# EAGLE board PCB_v1.1 (EAGLE 9.7.0)
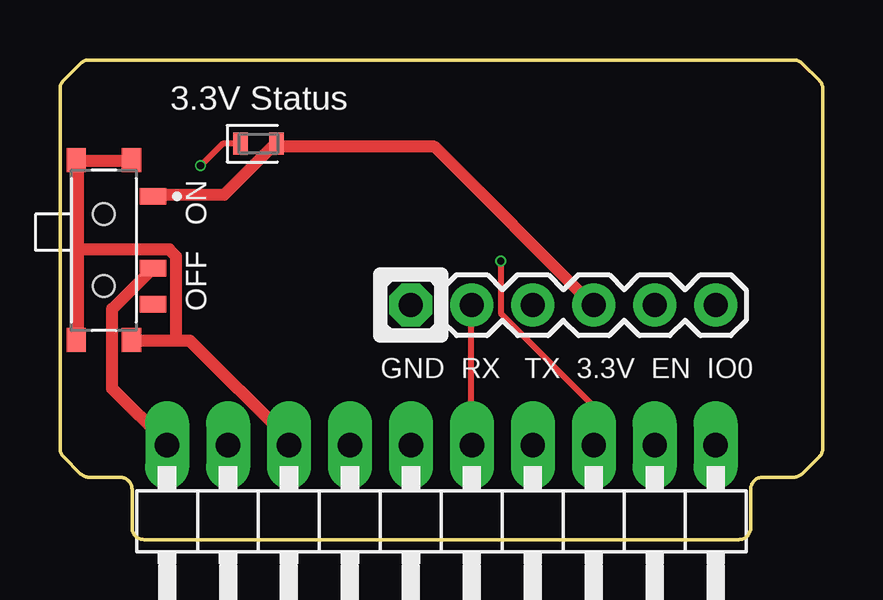
[diagram p0: board, top side]
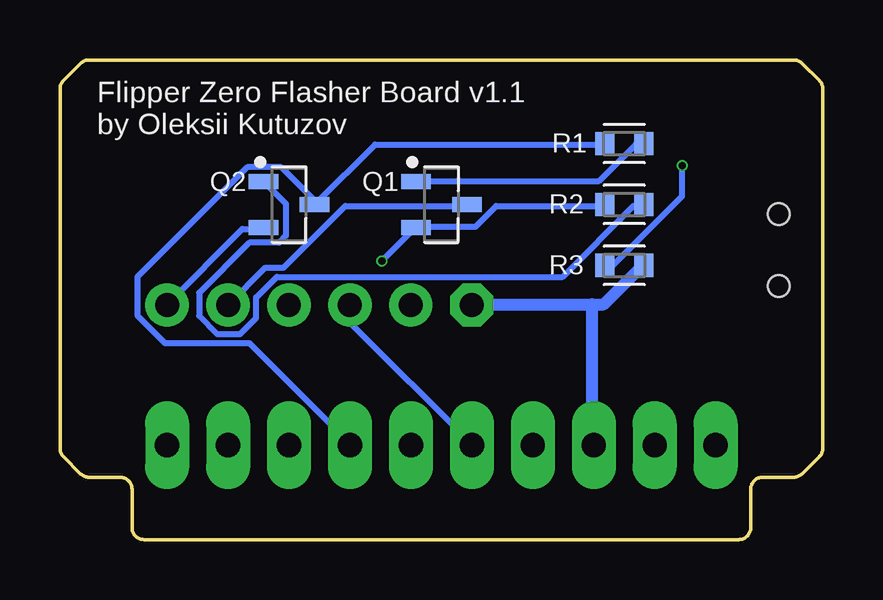
[diagram p1: board, bottom side, seen from below]

Size 31.78 x 20 mm. Coordinates in mm from the lower left corner, seen from the top.
Outline: 29.28,2.6 30.57,2.6 arc45 30.93,2.75 31.63,3.45 arc45 31.78,3.81 31.78,18.79 arc45 31.63,19.15 30.93,19.85 arc45 30.57,20 1.21,20 arc45 0.85,19.85 0.15,19.15 arc45 0,18.79 0,3.81 arc45 0.15,3.45 0.85,2.75 arc45 1.21,2.6 2.5,2.6 arc-90 3,2.1 3,0.5 arc90 3.5,0 28.28,0 arc90 28.78,0.5 28.78,2.1 arc-90 29.28,2.6
Copper layers (1*16): Top / Bottom
Stack-up Default Layer Stack: Top User Defined 0.035mm / Dielectric-1 User Defined 1.6mm / Bottom User Defined 0.035mm
Design rules "jlcpcb-2layers": minimum track width 5mil, minimum drill 0.3mm, track to track 5mil, track to pad 5mil, pad to pad 5mil, via to via 5mil, smd to smd 5mil, copper to edge 0.2mm, drill to drill 6mil, minimum pad ring 10mil, minimum via ring 3mil, stop-mask expansion 4mil, vias tented up to drill 0mil, thermal gap 10mil
Net classes: 0 default: width 0.254 mm; 1 Power: width 0.508 mm

## Footprints (pad centres in the part's own frame; a part is rotated, then mirrored left to right if it is on the bottom)
LEDC1608X55N_FLAT-B = smd 0.612 x 0.912: A 0.75,0; C -0.75,0
1X6-2.54-PLAIN = drill 1 octagon: 1 -6.35,0 | drill 1: 2 -3.81,0; 3 -1.27,0; 4 1.27,0; 5 3.81,0; 6 6.35,0
1X10/90 = drill 1.016 long: 1 -11.43,-3.81; 2 -8.89,-3.81; 3 -6.35,-3.81; 4 -3.81,-3.81; 5 -1.27,-3.81; 6 1.27,-3.81; 7 3.81,-3.81; 8 6.35,-3.81; 9 8.89,-3.81; 10 11.43,-3.81
SOT95P237X112-3N = smd 1.224 x 0.625: 1 -1.064,0.95; 2 -1.064,-0.95; 3 1.064,0
RESC1608X60 = smd 0.799 x 0.974: 1 -0.815,0; 2 0.815,0
SW_MLL1200S = smd 0.7 x 1.1: 1 -2.25,2.05; 2 0.75,2.05; 3 2.25,2.05 | smd 1 x 0.8: G1 -3.75,1.15; G2 3.75,1.15; G3 -3.75,-1.15; G4 3.75,-1.15 | hole 0.9: -1.5,0; 1.5,0

## Placement (x,y rotation side)
D1  LED_GREEN  [LEDC1608X55N_FLAT-B]  8.27,16.51 0 top
ESPF  ESPFLASH-1X6-2.54-PLAIN  [1X6-2.54-PLAIN]  20.97,9.78 0 top
JP1  PINHD-1X10/90  [1X10/90]  15.89,0.12 180 top
Q1  NPN  [SOT95P237X112-3N]  15.89,13.97 0 bottom
Q2  NPN  [SOT95P237X112-3N]  22.24,13.97 0 bottom
R1  12K  [RESC1608X60]  8.27,16.51 0 bottom
R2  12K  [RESC1608X60]  8.27,13.97 0 bottom
R3  4.7K  [RESC1608X60]  8.27,11.43 0 bottom
SW1  MLL1200S  [SW_MLL1200S]  1.83,12.06 270 top

## Library data of the parts
D1 = LED; CATEGORY: LED; COLOR: BLUE; DESCRIPTION: CHIP LED FLAT; SUB-CATEGORY: CHIP; TYPE: FLAT_TOP
ESPF = SuperHouse-ESPFlash
JP1 = Connector; CATEGORY: CONNECTOR; SUB-CATEGORY: PIN-HEADER
Q1 Q2 = Transistor; CATEGORY: Transistor; SUB-CATEGORY: BJT; TYPE: NPN
R1-R3 = Resistor; CATEGORY: Resistor; SUB-CATEGORY: Fixed
SW1 = MLL1200S; COMMENT: 1437575-1

## Nets
3.3V [Power]: JP1.10 SW1.2
CH_EN: ESPF.5 Q1.3
DTR: JP1.4 Q2.3 R1.1
ESP_3.3V [Power]: D1.A ESPF.4 SW1.1
FLIPPER_RX: ESPF.2 JP1.5
FLIPPER_TX: ESPF.3 JP1.6
GND [Power]: ESPF.1 JP1.8 R3.2 SW1.G1 SW1.G2 SW1.G3 SW1.G4
GPIO0: ESPF.6 Q2.2
N$1: D1.C R3.1
N$3: Q1.1 R1.2
N$5: Q2.1 R2.2
RTS: JP1.3 Q1.2 R2.1

## Tracks (layer width: path | path; a pad name or v marks a point on that pad's centre or on a via)
3.3V
  Top 0.508: SW1.2 3.79,11.24 2.17,9.62 2.17,6.29 4.46,4 JP1.10
CH_EN
  Bottom 0.254: ESPF.5 23.22,11.34 22.46,11.34 19.89,13.91 14.84,13.91 Q1.3
DTR
  Bottom 0.254: R1.1 9.13,16.48 18.65,16.48 21.13,14 Q2.3 21.13,14.1 22.56,15.53 23.99,15.53 28.56,10.95 28.56,9.34 27.41,8.19 23.89,8.19 19.7,4 JP1.4
ESP_3.3V
  Top 0.508: SW1.1 3.89,14.38 6.84,14.38 8.94,16.48 D1.A 9.22,16.38 15.6,16.38 22.18,9.81 ESPF.4
FLIPPER_RX
  Top 0.254: ESPF.2 17.13,9.72 17.13,4 JP1.5
FLIPPER_TX
  Bottom 0.254: ESPF.3 19.7,9.05 14.65,4 JP1.6
GND
  Top 0.508: 0.75,12.1 0.75,15.81 SW1.G3 0.94,15.81 2.94,15.81 SW1.G1 | 0.75,12.1 0.75,8.38 SW1.G4 | 4.84,8.29 5.41,8.29 9.51,4.19 9.51,4 JP1.8 | 4.84,8.29 3.03,8.29 SW1.G2 | 0.75,12.1 4.55,12.1 4.84,11.81 4.84,8.29
  Bottom 0.508: 9.6,9.81 14.56,9.81 ESPF.1 | 9.6,9.81 9.13,9.81 7.51,11.43 R3.2 | 9.6,9.81 9.6,4 JP1.8
GPIO0
  Bottom 0.254: Q2.2 23.32,12.95 24.18,12.95 27.32,9.81 ESPF.6
N$1  (via drill 0.3)
  Top 0.254: D1.C 6.78,16.51 v5.86,15.59
  Bottom 0.254: v5.86,15.59 5.86,14.32 8.75,11.43 R3.1
N$3
  Bottom 0.254: R1.2 7.51,16.48 7.79,16.48 9.32,14.95 16.94,14.95 Q1.1
N$5
  Bottom 0.254: R2.2 7.51,13.91 7.89,13.91 10.84,10.95 22.75,10.95 23.61,10.1 23.61,9.24 24.27,8.57 25.23,8.57 25.99,9.34 25.99,10.29 23.89,12.38 22.65,12.38 22.37,12.67 22.37,14 23.22,14.86 Q2.1
RTS  (via drill 0.3)
  Top 0.254: v18.37,11.62 18.37,9.43 22.18,5.62 22.18,4 JP1.3
  Bottom 0.254: R2.1 9.13,13.91 13.6,13.91 14.46,13.05 16.94,13.05 Q1.2 17.03,12.95 v18.37,11.62

## Text on the board
tNames: 3.3V Status | OFF ON | GND RX TX 3.3V EN IO0
bNames: Flipper Zero Flasher Board v1.1 / by Oleksii Kutuzov